# Altium PCB inverter.PcbDoc
Units mm, origin at the board's own origin, x right, y up, seen from the top; angles counter-clockwise.
Board outline 83 x 36.5 mm, 2 copper layers (Top Layer, Bottom Layer); 26 components, 21 nets, 76 pads, 87 vias.
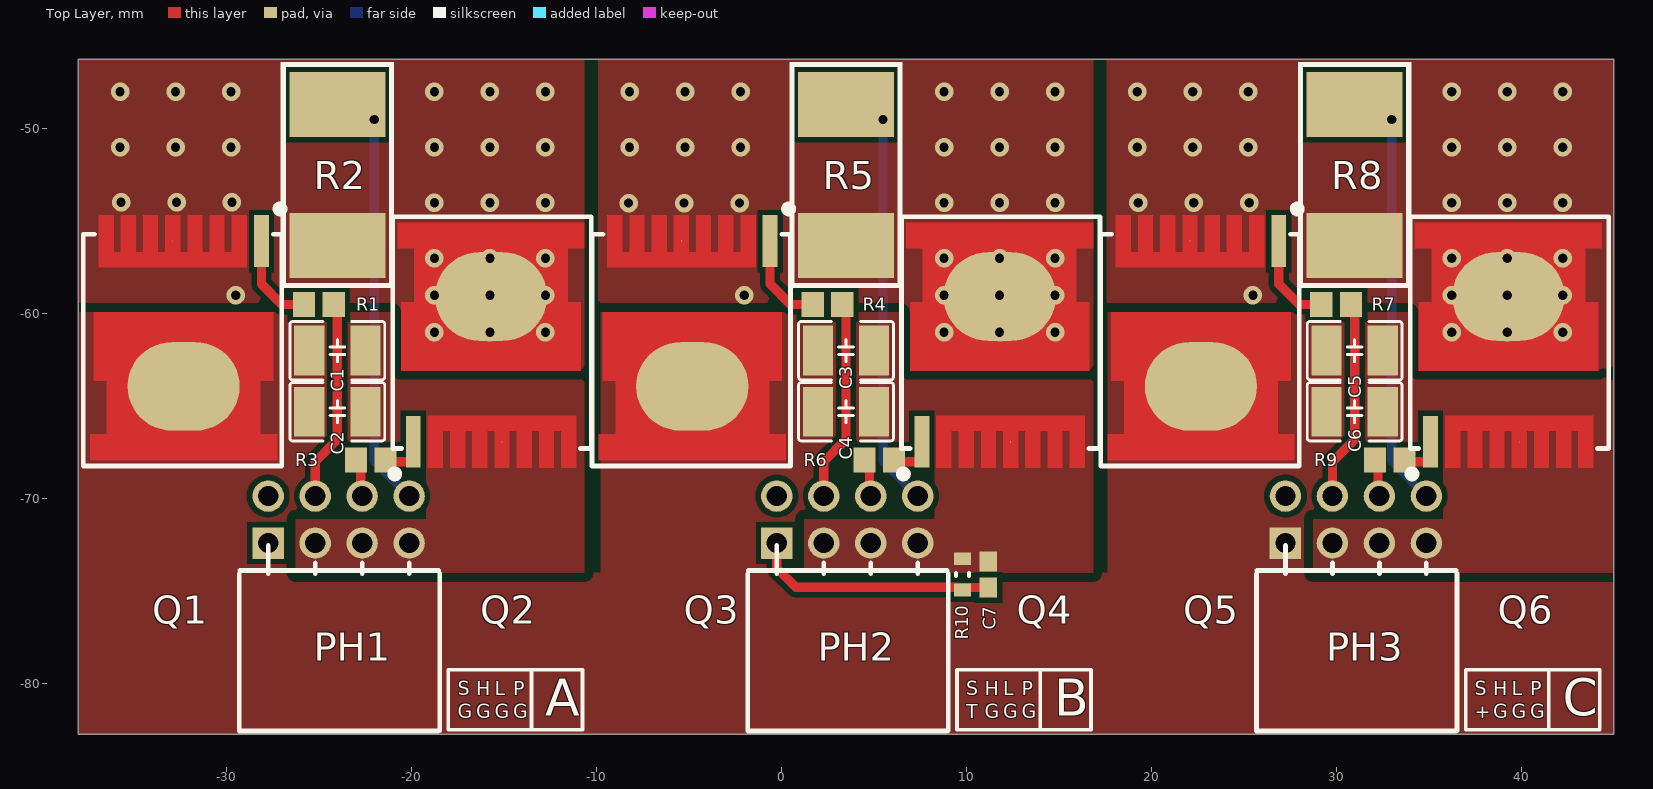
[diagram p0: Top Layer view]
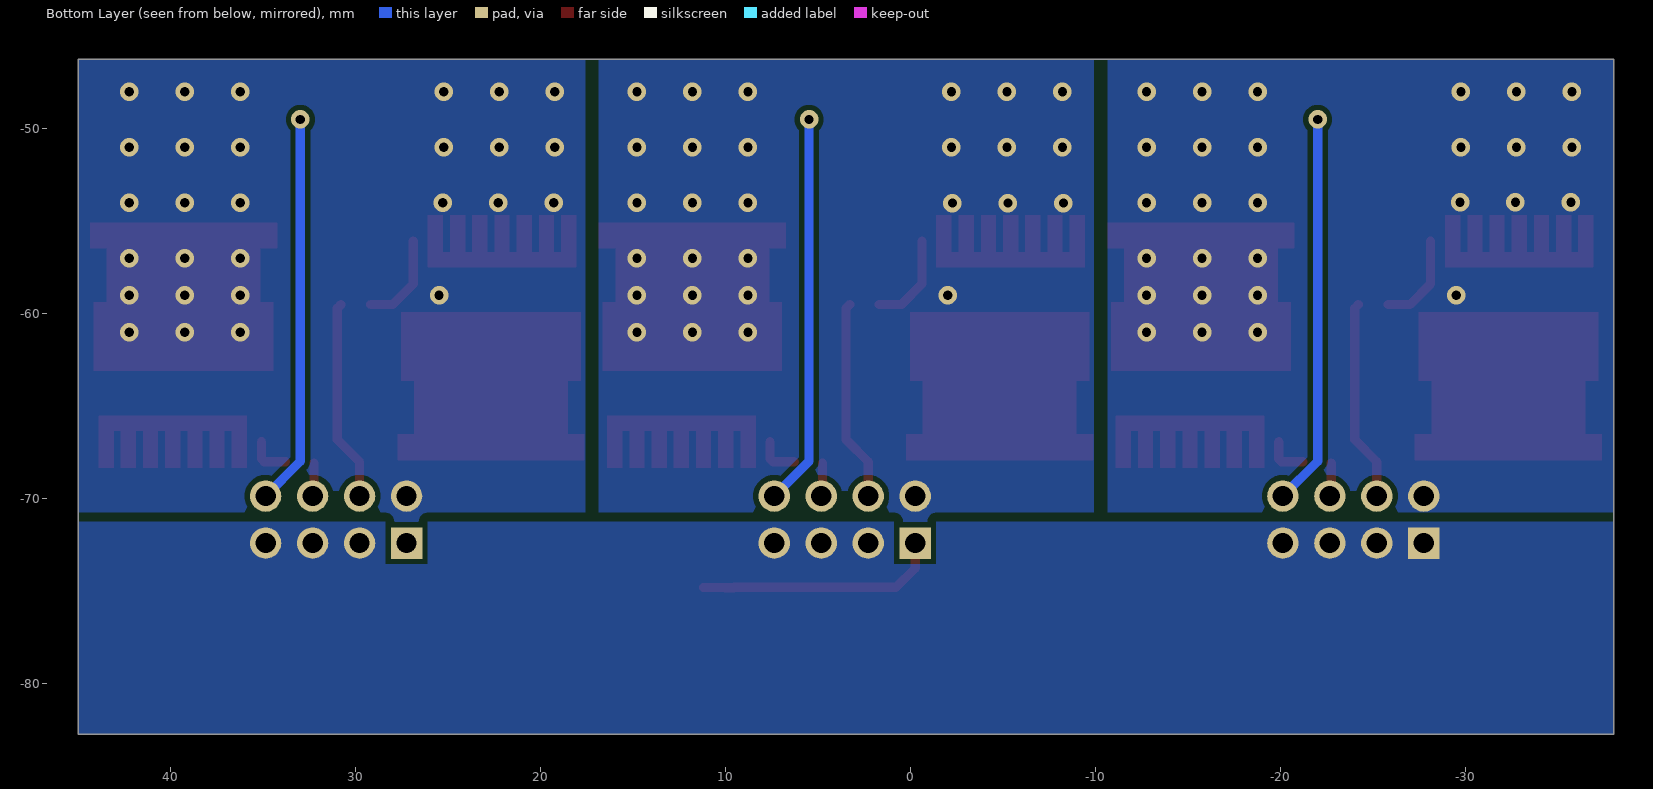
[diagram p1: Bottom Layer view, seen from below]
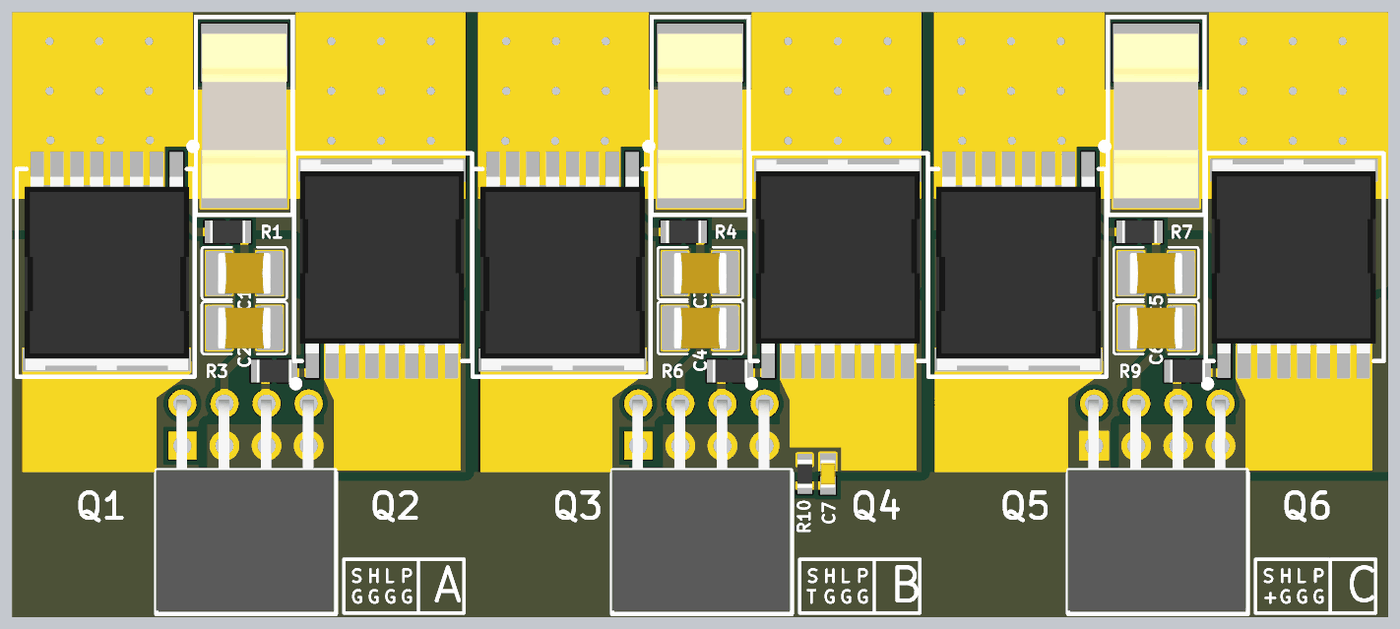
[diagram p2: 3D render of the assembled board from above, using the file's embedded part models]

## Layer stack, top to bottom
Top Solder: solder mask 0.0102, Solder Resist, Dk 3.5
Top Layer: signal copper 0.0356
Dielectric 1: dielectric 0.32, FR-4, Dk 4.8
Bottom Layer: signal copper 0.0356
Bottom Solder: solder mask 0.0102, Solder Resist, Dk 3.5

## Board outline
-38,-82.75 -38,-46.25 45,-46.25 45,-82.75

## Design rules (kind name [scope] priority, off if disabled: settings)
Clearance [All] p1: gap=0.3 ignorepadtopadclearanceinfootprint=FALSE except(0.5: Fill-Fill Fill-Poly Fill-Region Poly-Poly Poly-Region Region-Region)
DiffPairsRouting [All] p1: maxlimit=0.254 minlimit=0.2 mostfreqgap=0.254 toplayer_minwidth=0.2 toplayer_maxwidth=0.3 toplayer_prefwidth=0.2 bottomlayer_minwidth=0.2 bottomlayer_maxwidth=0.3 bottomlayer_prefwidth=0.2 maxuncoupledlength=12.7
MinimumSolderMaskSliver [All] p1: minsoldermaskwidth=0.075
PolygonConnect [All] p1: connectstyle=Direct reliefconductorwidth=0.254 reliefentries=4 polygonreliefangle="90 Angle" airgapwidth=0.254
RoutingVias [All] p1: holewidth=0.5 width=1 viastyle="Through Hole" minholewidth=0.2 minwidth=0.4 maxholewidth=1 maxwidth=2
SilkToSilkClearance [All] p1: silktosilkclearance=0
SilkToSolderMaskClearance [IsPad] p1: minsilkscreentomaskgap=0 clearancetoexposedcopper=TRUE
SolderMaskExpansion [All] p1: expansion=0.102 istentingtop=FALSE
Width [All] p1: maxlimit=1 minlimit=0.15 preferedwidth=0.3
26 further rules are at their usual default settings.

## Classes and differential pairs
component class Overview: C7 PH1 PH2 PH3 R10
component class Inverter: C1 C2 C3 C4 C5 C6 Q1 Q2 Q3 Q4 Q5 Q6 R1 R2 R3 R4 R5 R6 R7 R8 R9

## Components (designator, comment, footprint, x,y, rotation, side; value= is the part's Value field where it differs from the comment)
C1 "4u7" FS32X475K101EGG -24,-62 r180 top
C2 "4u7" FS32X475K101EGG -24,-65.3 r180 top
C3 "4u7" FS32X475K101EGG 3.5,-62 r180 top
C4 "4u7" FS32X475K101EGG 3.5,-65.3 r180 top
C5 "4u7" FS32X475K101EGG 31,-62 r180 top
C6 "4u7" FS32X475K101EGG 31,-65.3 r180 top
C7 "100n" CAP_0603 11.2,-74.1 r270 top
PH1 "PHASE_A" PH_2x4_F -23.959,-71.208 r0 top
PH2 "PHASE_B" PH_2x4_F 3.541,-71.208 r0 top
PH3 "PHASE_C" PH_2x4_F 31.041,-71.208 r0 top
Q1 "IPT015N10N5" IPT015N10N5 -30.5,-60 r180 top
Q2 "IPT015N10N5" IPT015N10N5 -17.5,-63 r0 top
Q3 "IPT015N10N5" IPT015N10N5 -3,-60 r180 top
Q4 "IPT015N10N5" IPT015N10N5 10,-63 r0 top
Q5 "IPT015N10N5" IPT015N10N5 24.5,-60 r180 top
Q6 "IPT015N10N5" IPT015N10N5 37.5,-63 r0 top
R1 "1R" RES_0805 -25,-59.5 r0 top
R2 "SHUNT_0m2_3920" ASR-M-5-0.2F-t1 -24,-52.5 r270 top
R3 "1R" RES_0805 -22.2,-67.9 r180 top
R4 "1R" RES_0805 2.5,-59.5 r0 top
R5 "SHUNT_0m2_3920" ASR-M-5-0.2F-t1 3.5,-52.5 r270 top
R6 "1R" RES_0805 5.3,-67.9 r180 top
R7 "1R" RES_0805 30,-59.5 r0 top
R8 "SHUNT_0m2_3920" ASR-M-5-0.2F-t1 31,-52.5 r270 top
R9 "1R" RES_0805 32.9,-67.9 r180 top
R10 "10k NTC" RES_0603 9.8,-74.1 r270 top

## Footprints (in the part's own frame and the unit in brackets; to place one, negate y for a bottom-side part, rotate by r counter-clockwise, add the part's x,y. Pads: shape width x height; smd on the part's side, far side on the other; paste and mask are expansions set on the pad)
ASR-M-5-0.2F-t1 [mm]
  rect 3.5x5.2 smd: 1(-3.81,0) 2(3.81,0)
  silkscreen extent -6.1,-3.05 6.1,3.05, body extent -4.95,-2.55 4.98,2.55, height 1.02
CAP_0603 [mm] "Capacitor SMD 0603 Generic"
  rect 1.1x0.95 smd: 1(-0.7,0) 2(0.7,0)
  body extent -0.85,-0.45 0.85,0.45, height 0.9
FS32X475K101EGG [mm] "100V 4.7uF X7R ±10% 1210 Multilayer Ceramic Capacitors MLCC - SMD/SMT ROHS"
  rect 1.635x2.7 smd paste-100 mask+0.051: 1(-1.517,0) 2(1.517,0)
  silkscreen extent -2.56,-1.58 2.56,1.58, body extent -1.6,-1.25 1.6,1.25, height 2.5
IPT015N10N5 [mm] "100V 500A 533W 1.35mO 1 N-channel HSOF-8 MOSFETs ROHS"
  rect 0.8x2.8 smd: 1(-2.398,-3.927)
  round 0.025 smd: 2(2.397,-3.933)
  oval 6.06x4.8 smd: 3(1.812,3.927)
  Top Layer region: -3.239,6.557 -3.239,6.557 -3.239,7.927 -3.229,7.927 6.861,7.927 6.861,6.527 5.961,6.527 5.961,3.627 6.661,3.627 6.661,-0.073 -3.039,-0.073 -3.039,3.627 -2.339,3.627 -2.339,6.527 -3.239,6.527 -3.239,6.557 -3.239,6.557 -3.239,6.557 -3.239,6.557
  Top Layer region: -1.608,-5.343 -1.608,-2.523 6.402,-2.523 6.402,-5.333 6.392,-5.333 5.602,-5.333 5.602,-3.333 5.202,-3.333 5.202,-5.333 4.402,-5.333 4.402,-3.333 4.002,-3.333 4.002,-5.333 3.202,-5.333 3.202,-3.333 2.802,-3.333 2.802,-5.333 2.002,-5.333 2.002,-3.333 1.602,-3.333 1.602,-5.333 0.802,-5.333 0.802,-3.333 0.402,-3.333 0.402,-5.333 -0.398,-5.333 -0.398,-3.333 -0.798,-3.333 -0.798,-5.333 -1.608,-5.343
  silkscreen extent -3.6,-5.86 7.23,8.24, body extent -3.15,-3.82 6.75,7.85, height 2.31
PH_2x4_F [mm] "2.54mm 2.54mm Double Row 3A Copper alloy 8P -40?~+105? Bend-in 2x4P Side 8.5mm Square Hole Push-Pull,P=2.54mm Female Headers ROHS"
  rect 1.7x1.7 hole 1.1 paste-2539.97 mask+0.05: 1(-3.781,-1.192)
  round 1.7 hole 1.1 paste-2539.97 mask+0.05: 2(-3.781,1.348) 3(-1.241,-1.192) 4(-1.241,1.348) 5(1.299,-1.192) 6(1.299,1.348) 7(3.839,-1.192) 8(3.839,1.348)
  silkscreen extent -5.35,-11.35 5.49,-1.32, body extent -5.38,-11.15 5.39,1.55, height 4.75
RES_0603 [mm] "Chip Resistor, 2-Leads, Body 1,60x0,80mm, IPC Medium Density"
  rect 0.7x0.9 smd: 1(-0.85,0) 2(0.85,0)
  silkscreen extent -0.1,-0.35 0.1,0.35, body extent -0.85,-0.45 0.85,0.45, height 0.55
RES_0805 [mm] "Chip Resistor SMD 0805"
  rect 1.2x1.35 smd: 1(-0.8,0) 2(0.8,0)
  body extent -1.05,-0.67 1.05,0.67, height 0.6

## Part data
C1 C2 C3 C4 C5 C6: "100V 4.7uF X7R ±10% 1210 Multilayer Ceramic Capacitors MLCC - SMD/SMT ROHS", LCSC=C381466, Mfr.="PSA(Prosperity Dielectrics)", Mfr. Part=FS32X475K101EGG, Package=1210, Voltage Rating=100V
C7: library part CAP_0603, "Multilayer Ceramic Capacitors MLCC - SMD/SMT ROHS", Package=0603
PH1 PH2 PH3: library part PH_2x4_F, "2.54mm 2.54mm Double Row 3A Copper alloy 10P -40℃~+105℃ Bend-in 2x5P Side 8.5mm Square Hole Push-Pull,P=2.54mm Female Headers ROHS", LCSC=C2897424, Mfr.=HCTL, Mfr. Part=PM254-2-04-W-8.5
Q1 Q2 Q3 Q4 Q5 Q6: "100V 500A 533W 1.35mΩ 1 N-channel HSOF-8 MOSFETs ROHS", LCSC=C19626223, Mfr.=Tokmas, Mfr. Part=IPT015N10N5
R1 R3 R4 R6 R7 R9: library part RES_0805, "Resistor SMD 0805 Generic", Package=0805
R2 R5 R8: "12W 0.2mΩ Patch Splitter ±200ppm/℃ ±1% 3920 Current Sense Resistors / Shunt Resistors ROHS", LCSC=C469432, Mfr.="Shenzhen Yezhan Elec.", Mfr. Part=ASR-M-5-0.2F-t1
R10: library part RES_0603, "100mW Thick Film Resistors", Package=0603

## Via types
v1: diameter 1, hole 0.5, Top Layer to Bottom Layer, 87 vias

## Nets (pads, with @x,y where several pads share a name; then routed paths per layer and width w, separated by ;. In a path a pad name is that pad's centre, name@x,y a point inside that pad or via, vN(x,y) a via of type N, cw(c..) or ccw(c..) an arc to the next point about the centre after c; other vN are vias at no path point)
+100V: C1.2 C2.2 C3.2 C4.2 C5.2 C6.2 PH3.1 Q1.3 Q3.3 Q5.3
G_AH1: Q1.1 R1.1 | length 5.1
  Top Layer w0.5: Q1.1 -28.102,-58.398 -27,-59.5 R1.1
G_AL1: Q2.1 R3.1 | length 2.3
  Top Layer w0.5: R3.1@-21.2,-68 -20.048,-68 -19.898,-67.85 Q2.1
G_BH1: Q3.1 R4.1 | length 5.1
  Top Layer w0.5: Q3.1 -0.602,-58.398 0.5,-59.5 R4.1
G_BL1: Q4.1 R6.1 | length 2.3
  Top Layer w0.5: R6.1@6.3,-68 7.452,-68 7.602,-67.85 Q4.1
G_CH1: Q5.1 R7.1 | length 5.1
  Top Layer w0.5: Q5.1 26.898,-58.398 28,-59.5 R7.1
G_CL1: Q6.1 R9.1 | length 2.3
  Top Layer w0.5: R9.1@33.8,-68 34.952,-68 35.102,-67.85 Q6.1
GND: C1.1 C2.1 C3.1 C4.1 C5.1 C6.1 C7.1 PH1.1 PH1.3 PH1.5 PH1.7 PH2.3 PH2.5 PH2.7 PH3.3 PH3.5 PH3.7 Q2.2 Q4.2 Q6.2 R10.1
HG_A: PH1.4 R1.2 | length 10.9
  Top Layer w0.5: PH1.4 -25.2,-68 -24,-66.8 -24,-59.7 R1.2
HG_B: PH2.4 R4.2 | length 10.9
  Top Layer w0.5: PH2.4 2.3,-68 3.5,-66.8 3.5,-59.7 R4.2
HG_C: PH3.4 R7.2 | length 10.9
  Top Layer w0.5: PH3.4 29.8,-68 31,-66.8 31,-59.7 R7.2
LG_A: PH1.6 R3.2 | length 1.8
  Top Layer w0.5: R3.2@-22.73,-68.07 -22.73,-69.79 PH1.6
LG_B: PH2.6 R6.2 | length 1.8
  Top Layer w0.5: R6.2@4.77,-68.07 4.77,-69.79 PH2.6
LG_C: PH3.6 R9.2 | length 1.8
  Top Layer w0.5: R9.2@32.27,-68.07 32.27,-69.79 PH3.6
NTC: C7.2 PH2.1 R10.2 | length 13.2
  Top Layer w0.5: PH2.1 -0.24,-73.76 0.793,-74.793 9.543,-74.793 9.564,-74.814 10.036,-74.814 10.05,-74.8 C7.2
PH_A: PH1.8 R2.1 | length 21.1
  Bottom Layer w0.5: v1(-22,-49.5) -22,-67.98 PH1.8
PH_B: PH2.8 R5.1 | length 21.1
  Bottom Layer w0.5: v1(5.5,-49.5) 5.5,-67.98 PH2.8
PH_C: PH3.8 R8.1 | length 21.1
  Bottom Layer w0.5: v1(33,-49.5) 33,-67.98 PH3.8
SH_A: PH1.2 Q1.2 Q2.3 R2.2
  other v1: -18.75,-61 -15.75,-61 -12.75,-61 -29.5,-59 -18.75,-59 -15.75,-59 -12.75,-59 -18.75,-57 -15.75,-57 -12.75,-57 -18.75,-54 -15.75,-54 -12.75,-54 -35.697,-53.977 -32.697,-53.977 -29.697,-53.977 -35.75,-51 -32.75,-51 -29.75,-51 -18.75,-51 -15.75,-51 -12.75,-51 -35.75,-48 -32.75,-48 -29.75,-48 -18.75,-48 -15.75,-48 -12.75,-48
SH_B: PH2.2 Q3.2 Q4.3 R5.2
  other v1: 8.8,-61 11.8,-61 14.8,-61 -2,-59 8.8,-59 11.8,-59 14.8,-59 8.8,-57 11.8,-57 14.8,-57 -8.253,-54.019 -5.253,-54.019 -2.253,-54.019 8.8,-54 11.8,-54 14.8,-54 -8.2,-51 -5.2,-51 -2.2,-51 8.8,-51 11.8,-51 14.8,-51 -8.2,-48 -5.2,-48 -2.2,-48 8.8,-48 11.8,-48 14.8,-48
SH_C: PH3.2 Q5.2 Q6.3 R8.2
  other v1: 36.25,-61 39.25,-61 42.25,-61 25.5,-59 36.25,-59 39.25,-59 42.25,-59 36.25,-57 39.25,-57 42.25,-57 19.3,-54 22.3,-54 25.3,-54 36.25,-54 39.25,-54 42.25,-54 19.25,-51 22.25,-51 25.25,-51 36.25,-51 39.25,-51 42.25,-51 19.25,-48 22.25,-48 25.25,-48 36.25,-48 39.25,-48 42.25,-48

## Polygon pours and split planes (outlines as drawn)
+100V on Top Layer "NONET_L01_P-001" (solid, pour order 22): 3.611,-68.7 3.611,-74 -9.75,-74 -9.75,-59.927 3.611,-59.927
+100V on Top Layer "NONET_L01_P-001" (solid, pour order 21): -38,-74 -38,-82.75 45,-82.75 45,-74
SH_A on Top Layer "NONET_L01_P-001" (solid, pour order 27): -10.639,-64 -38,-64 -38,-46.25 -10.639,-46.25
+100V on Top Layer "NONET_L01_P-001" (solid, pour order 26): -24,-68.7 -24,-74 -38,-74 -38,-59.927 -24,-59.927
SH_B on Top Layer "NONET_L01_P-001" (solid, pour order 25): 16.861,-64 -9.9,-64 -9.9,-46.25 16.861,-46.25
SH_C on Top Layer "NONET_L01_P-001" (solid, pour order 20): 45,-64 17.6,-64 17.6,-46.25 45,-46.25
+100V on Top Layer "NONET_L01_P-001" (solid, pour order 19): 31,-68.7 31,-74 17.639,-74 17.639,-59.927 31,-59.927
GND on Top Layer "NONET_L01_P-001" (solid, pour order 16): 35.8,-71.1 35.8,-68.3 31,-68.3 31,-59.927 45,-59.927 45,-74 28.75,-74 28.75,-71.1
GND on Top Layer "NONET_L01_P-001" (solid, pour order 15): 8.3,-71.1 8.3,-68.3 3.5,-68.3 3.5,-59.927 16.857,-59.927 16.857,-74 1.25,-74 1.25,-71.1
GND on Top Layer "NONET_L01_P-001" (solid, pour order 13): -19.2,-71.1 -19.2,-68.3 -24,-68.3 -24,-59.927 -10.643,-59.927 -10.643,-74 -26.25,-74 -26.25,-71.1
no net on Top Solder "NONET_L01_P-001" (solid): 6.6,-46.25 6.6,-50.9 0.4,-50.9 0.4,-46.25 -9.9,-46.25 -9.9,-57.5 -1.3,-57.5 -1.3,-54.356 0.1,-54.356 0.1,-57.5 16.9,-57.5 16.9,-46.25
no net on Top Solder "NONET_L01_P-001" (solid): 34.2,-46.26 34.2,-50.9 27.9,-50.9 27.9,-46.26 17.603,-46.26 17.603,-57.51 26.203,-57.51 26.203,-54.366 27.603,-54.366 27.603,-57.51 45,-57.51 45,-46.26
no net on Top Solder "NONET_L01_P-001" (solid): -20.9,-46.26 -20.9,-50.9 -27.1,-50.9 -27.1,-46.26 -38,-46.26 -38,-57.51 -28.797,-57.51 -28.797,-54.366 -27.397,-54.366 -27.397,-57.51 -10.597,-57.51 -10.597,-46.26
no net on Top Solder "NONET_L01_P-001" (solid): 25.7,-69.5 27.8,-68 27.8,-67.3 17.6,-67.3 17.6,-74 25.7,-74
no net on Top Solder "NONET_L01_P-001" (solid): 36.4,-69.65 35.8,-68.4 35.8,-65.5 44.05,-65.5 44.05,-73.9 36.4,-73.9
no net on Top Solder "NONET_L01_P-001" (solid): -1.8,-69.5 0.3,-68 0.3,-67.3 -9.9,-67.3 -9.9,-74 -1.8,-74
no net on Top Solder "NONET_L01_P-001" (solid): 8.9,-72.5 12,-72.5 12,-73.9 16.55,-73.9 16.55,-65.5 8.3,-65.5 8.3,-68.4 8.9,-69.65
no net on Top Solder "NONET_L01_P-001" (solid): -18.6,-69.65 -19.2,-68.4 -19.2,-65.5 -10.95,-65.5 -10.95,-73.9 -18.6,-73.9
no net on Top Solder "NONET_L01_P-001" (solid): -29.3,-69.5 -27.2,-68 -27.2,-67.3 -37.4,-67.3 -37.4,-74 -29.3,-74
SH_A on Bottom Layer "NONET_L01_P-001" (solid, pour order 29): -10.639,-71.25 -38,-71.25 -38,-46.25 -10.639,-46.25
GND on Bottom Layer "NONET_L01_P-001" (solid, pour order 18): -38,-82.75 45,-82.75 45,-71.25 -38,-71.25
SH_C on Bottom Layer "NONET_L01_P-001" (solid, pour order 28): 45,-71.25 17.6,-71.25 17.6,-46.25 45,-46.25
SH_B on Bottom Layer "NONET_L01_P-001" (solid, pour order 23): 16.861,-71.25 -9.9,-71.25 -9.9,-46.25 16.861,-46.25

## Silkscreen, mask and mechanical layers (free items; w line width, h text height)
Top Overlay:
  lines w0.2: -13.5,-82.5 -13.5,-79.25 ; 14,-82.5 14,-79.25 ; 41.5,-82.5 41.5,-79.25 ; -18,-82.5 -10.75,-82.5 -10.75,-79.25 -18,-79.25 -18,-82.5 ; 9.5,-82.5 16.75,-82.5 16.75,-79.25 9.5,-79.25 9.5,-82.5 ; 37,-82.5 44.25,-82.5 44.25,-79.25 37,-79.25 37,-82.5
  text "S" at -17.5,-80.625 h0.75
  text "H" at -16.5,-80.625 h0.75
  text "L" at -15.5,-80.625 h0.75
  text "P" at -14.5,-80.625 h0.75
  text "S" at 10,-80.625 h0.75
  text "H" at 11,-80.625 h0.75
  text "L" at 12,-80.625 h0.75
  text "P" at 13,-80.625 h0.75
  text "S" at 37.5,-80.625 h0.75
  text "H" at 38.5,-80.625 h0.75
  text "L" at 39.5,-80.625 h0.75
  text "P" at 40.5,-80.625 h0.75
  text "A" at -12.75,-81.75 h2
  text "B" at 14.75,-81.75 h2
  text "C" at 42.25,-81.75 h2
  text "G" at -17.5,-81.875 h0.75
  text "G" at -16.5,-81.875 h0.75
  text "G" at -15.5,-81.875 h0.75
  text "G" at -14.5,-81.875 h0.75
  text "T" at 10,-81.875 h0.75
  text "G" at 11,-81.875 h0.75
  text "G" at 12,-81.875 h0.75
  text "G" at 13,-81.875 h0.75
  text "+" at 37.5,-81.875 h0.75
  text "G" at 38.5,-81.875 h0.75
  text "G" at 39.5,-81.875 h0.75
  text "G" at 40.5,-81.875 h0.75
Dimensions:
  the board outline again, w0.1